# EAGLE board board (EAGLE 9.2.2)
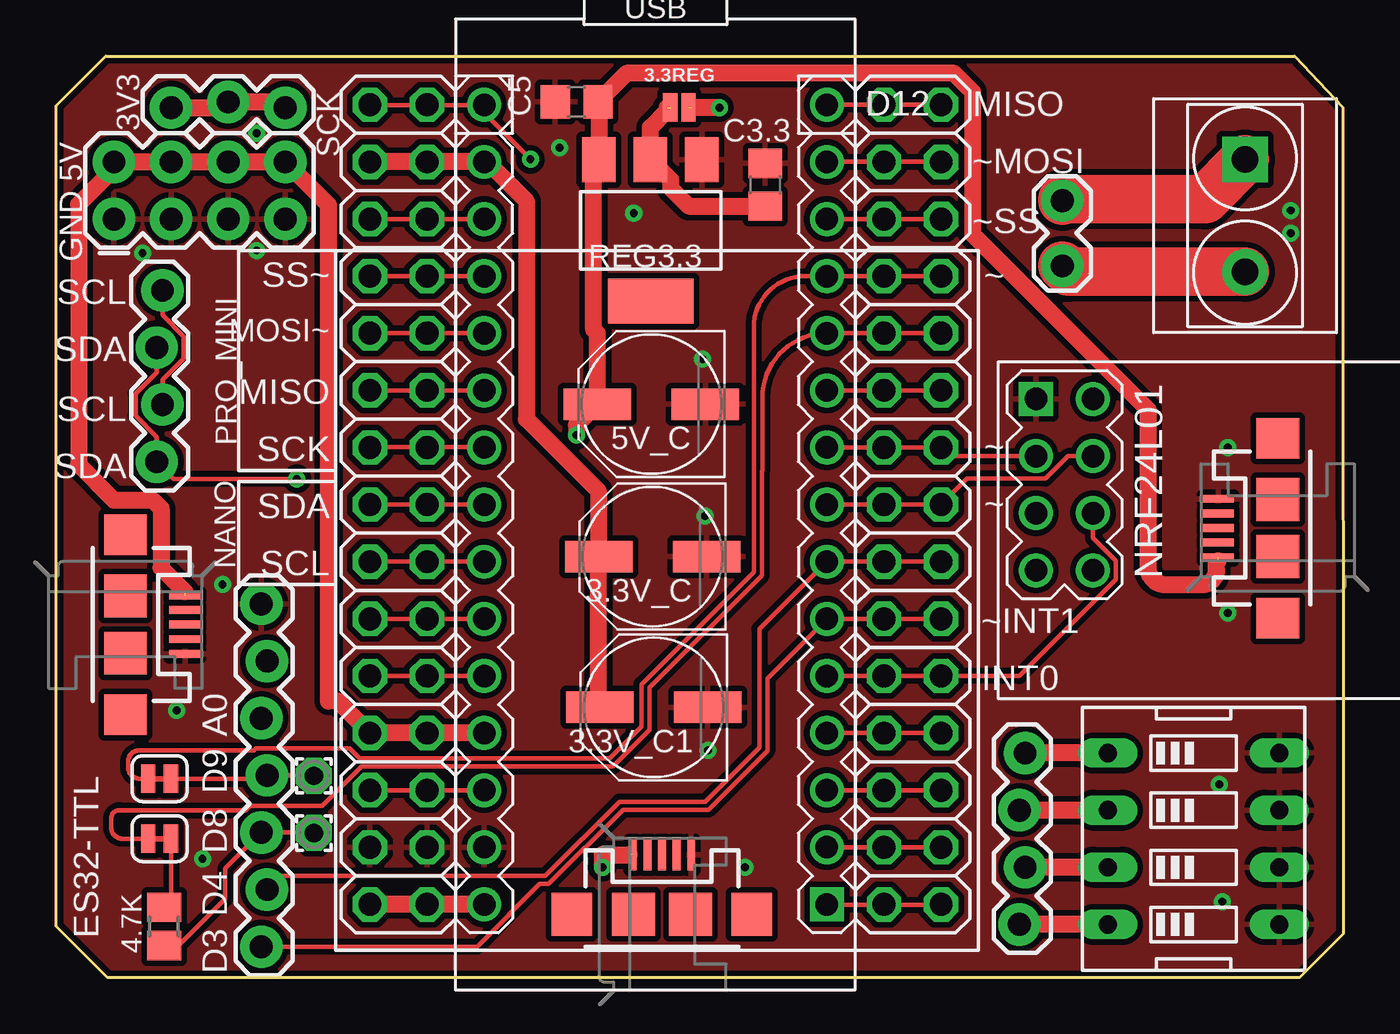
[diagram p0: board, top side]
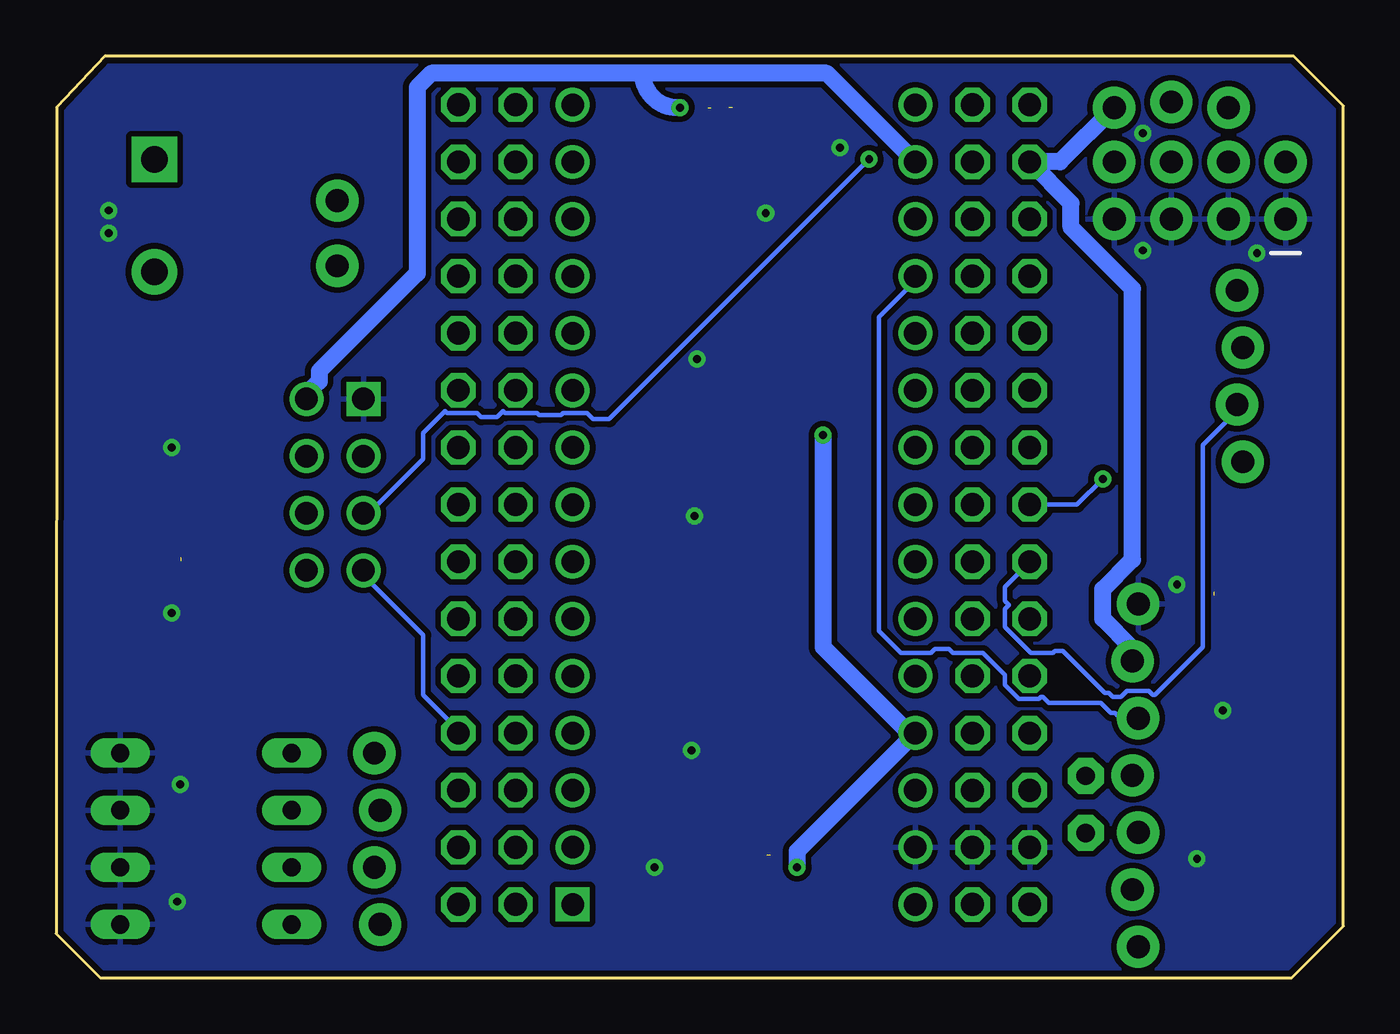
[diagram p1: board, bottom side, seen from below]

Size 57.23 x 40.97 mm. Coordinates in mm from the lower left corner, seen from the top.
Outline: 55.27,0 2.29,0 0,2.29 0,38.76 2.21,40.97 55.07,40.97 57.2,38.71 57.23,1.96 55.27,0
Copper layers (1*16): Top 0.035mm / dielectric 1.5mm / Bottom 0.035mm
Design rules "default *": minimum track width 6mil, minimum drill 0.35mm, track to track 6mil, track to pad 6mil, pad to pad 6mil, via to via 6mil, smd to smd 6mil, copper to edge 10mil, drill to drill 6mil, minimum pad ring 10mil, minimum via ring 8mil, stop-mask expansion 4mil, vias tented up to drill 0mil, thermal gap 10mil
Net classes: 0 default: width 0.203 mm; 1 power: width 0.762 mm, clearance 0.254 mm; 2 terminal: width 2.159 mm, clearance 0.305 mm

## Footprints (pad centres in the part's own frame; a part is rotated, then mirrored left to right if it is on the bottom)
SMT-JUMPER_2_NO_NO-SILK = smd 0.635 x 1.27: 1 -0.406,0; 2 0.406,0
PANASONIC_D = smd 3 x 1.4: + 2.4,0; - -2.4,0
1X03_LOCK = drill 1.016 pad 1.88: 1 0,0.127; 2 2.54,-0.127; 3 5.08,0.127
2X4 = drill 1.016 pad 1.88: 1 -3.81,-1.27; 2 -3.81,1.27; 3 -1.27,-1.27; 4 -1.27,1.27; 5 1.27,-1.27; 6 1.27,1.27; 7 3.81,-1.27; 8 3.81,1.27
C0805 = smd 1.3 x 1.5: 1 -0.95,0; 2 0.95,0
1X07_LOCK = drill 1.016 pad 1.88: 1 0,0.127; 2 2.54,-0.127; 3 5.08,0.127; 4 7.62,-0.127; 5 10.16,0.127; 6 12.7,-0.127; 7 15.24,0.127
1X04_LOCK = drill 1.016 pad 1.88: 1 0,0.127; 2 2.54,-0.127; 3 5.08,0.127; 4 7.62,-0.127
SMT-JUMPER_2_NC_TRACE_SILK = smd 0.635 x 1.27: 1 -0.508,0; 2 0.508,0
USB-MICROB = smd 1.4 x 0.35: D+ -2.65,0; D- -2.65,-0.65; GND -2.65,1.3; ID -2.65,0.65; VBUS -2.65,-1.3 | smd 1.9 x 1.8: MT1 0,-4; MT2 0,4 | smd 1.9 x 1.9: P$1 0,-1.27; P$2 0,1.27
ARDUINO-NANO-3.0 = drill 1 square: J1.1 17.78,7.62 | drill 1: J1.2 15.24,7.62; J1.3 12.7,7.62; J1.4 10.16,7.62; J1.5 7.62,7.62; J1.6 5.08,7.62; J1.7 2.54,7.62; J1.8 0,7.62; J1.9 -2.54,7.62; J1.10 -5.08,7.62; J1.11 -7.62,7.62; J1.12 -10.16,7.62; J1.13 -12.7,7.62; J1.14 -15.24,7.62; J1.15 -17.78,7.62; J2.1 17.78,-7.62; J2.2 15.24,-7.62; J2.3 12.7,-7.62; J2.4 10.16,-7.62; J2.5 7.62,-7.62; J2.6 5.08,-7.62; J2.7 2.54,-7.62; J2.8 0,-7.62; J2.9 -2.54,-7.62; J2.10 -5.08,-7.62; J2.11 -7.62,-7.62; J2.12 -10.16,-7.62; J2.13 -12.7,-7.62; J2.14 -15.24,-7.62; J2.15 -17.78,-7.62
WIRELESS-NRF24L01 = drill 1 square: 1 -12.7,6.35 | drill 1: 2 -10.16,6.35; 3 -12.7,3.81; 4 -10.16,3.81; 5 -12.7,1.27; 6 -10.16,1.27; 7 -12.7,-1.27; 8 -10.16,-1.27
1,6/0,8 = drill 0.813 pad 1.6 octagon: 1 0,0
2X15 = drill 1.016 octagon: 1 -17.78,-1.27; 2 -17.78,1.27; 3 -15.24,-1.27; 4 -15.24,1.27; 5 -12.7,-1.27; 6 -12.7,1.27; 7 -10.16,-1.27; 8 -10.16,1.27; 9 -7.62,-1.27; 10 -7.62,1.27; 11 -5.08,-1.27; 12 -5.08,1.27; 13 -2.54,-1.27; 14 -2.54,1.27; 15 0,-1.27; 16 0,1.27; 17 2.54,-1.27; 18 2.54,1.27; 19 5.08,-1.27; 20 5.08,1.27; 21 7.62,-1.27; 22 7.62,1.27; 23 10.16,-1.27; 24 10.16,1.27; 25 12.7,-1.27; 26 12.7,1.27; 27 15.24,-1.27; 28 15.24,1.27; 29 17.78,-1.27; 30 17.78,1.27
1X02_LOCK = drill 1.016 pad 1.88: 1 -0.178,0; 2 2.718,0
R2012 = smd 1.3 x 1.5: 1 -0.85,0; 2 0.85,0
SOT223 = smd 1.499 x 2.007: 1 -2.261,-3.15; 2 0.025,-3.15; 3 2.311,-3.15 | smd 3.81 x 2.007: 4 0,3.15
EDG-04 = drill 0.813 long: 1 -3.81,-3.81; 2 -1.27,-3.81; 3 1.27,-3.81; 4 3.81,-3.81; 5 3.81,3.81; 6 1.27,3.81; 7 -1.27,3.81; 8 -3.81,3.81
H2-5.0-10.5X8.0MM = drill 1.168 pad 2.032 square: 1 0,2.5 | drill 1.168 pad 2.032: 2 0,-2.5

## Placement (x,y rotation side)
3.3REG  JUMPER-SMT_2_NO_NO-SILK  [SMT-JUMPER_2_NO_NO-SILK]  27.71,38.68 0 top
3.3V_C  [PANASONIC_D]  26.52,18.72 180 top
3.3V_C1  [PANASONIC_D]  26.57,12.01 180 top
3V3  [1X03_LOCK]  10.19,38.81 180 top
5.GND  [2X4]  6.38,35 0 top
5V_C  [PANASONIC_D]  26.47,25.5 180 top
C3.3  100nF  [C0805]  31.52,35.26 270 top
C5  100nF  [C0805]  23.14,38.94 180 top
ES32-TTL  [1X07_LOCK]  9.25,1.37 90 top
I2C_1  [1X04_LOCK]  4.6,30.56 270 top
J4  [1X04_LOCK]  42.95,2.36 90 top
JP1  [SMT-JUMPER_2_NC_TRACE_SILK]  4.6,6.17 0 top
JP2  [SMT-JUMPER_2_NC_TRACE_SILK]  4.6,8.84 0 top
MICRO_1  [USB-MICROB]  54.31,19.99 0 top
MICRO_2  [USB-MICROB]  26.93,2.81 270 top
MICRO_3  [USB-MICROB]  3.07,15.7 180 top
NANO  ARDUINO-NANO-3.0  [ARDUINO-NANO-3.0]  26.64,21.03 270 top
NRF24L01  [WIRELESS-NRF24L01]  56.26,19.38 0 top
PAD1  [1,6/0,8]  11.46,8.97 180 top
PAD2  [1,6/0,8]  11.46,6.43 180 top
PH1  [2X15]  15.21,21.03 270 top
PH2  [2X15]  38.07,21.03 270 top
PIN1  [1X02_LOCK]  44.73,31.83 90 top
R1  4.7k  [R2012]  4.8,2.27 270 top
REG3.3  REG1117  [SOT223]  26.44,33.22 180 top
SW1  [EDG-04]  50.57,6.17 270 top
T1_5MM  5mm  [H2-5.0-10.5X8.0MM]  52.86,33.88 0 top

## Library data of the parts
3.3REG JP1 JP2 = SparkFun-Jumpers
3.3V_C 3.3V_C1 5V_C = rcl
3V3 5.GND ES32-TTL PIN1 = SparkFun-Connectors
C3.3 C5 = rcl; SPICEPREFIX: C
I2C_1 J4 = SparkFun-Connectors; PROD_ID: CONN-09696
MICRO_1-MICRO_3 = SparkFun-Connectors; PROD_ID: CONN-09505; SF_ID: PRT-08533
NANO NRF24L01 = diy-modules
PAD1 PAD2 = wirepad
PH1 PH2 = pinhead
R1 = rcl; SPICEPREFIX: R
REG3.3 = burr-brown; MPN: REG1117; OC_FARNELL: 1097566; OC_NEWARK: 14P6981
SW1 = special
T1_5MM = Seeed-Connector

## Nets
3.3V [power]: 3.3REG.2 3.3V_C1.+ 3.3V_C.+ 3V3.1 3V3.2 3V3.3 ES32-TTL.6 NANO.J2.14 NRF24L01.2 PH1.3 PH1.4
5V [power]: 5.GND.2 5.GND.4 5.GND.6 5.GND.8 5V_C.+ C5.1 MICRO_1.VBUS MICRO_2.VBUS MICRO_3.VBUS NANO.J2.4 PH1.23 PH1.24 REG3.3.3
A6: NANO.J2.6 PH1.19 PH1.20
A7: NANO.J2.5 PH1.21 PH1.22
CE_NRF: NANO.J1.9 NRF24L01.3 PH2.13 PH2.14
CSN_NRF: NANO.J1.8 NRF24L01.4 PH2.15 PH2.16
ES32_AUX: ES32-TTL.5 NANO.J2.12 PH1.7 PH1.8
ES32_RXD: ES32-TTL.3 PAD2.1 R1.2
ES32_TXD: JP2.1 NANO.J1.12 PH2.7 PH2.8
GND [power]: 3.3V_C1.- 3.3V_C.- 5.GND.1 5.GND.3 5.GND.5 5.GND.7 5V_C.- C3.3.1 C5.2 ES32-TTL.7 MICRO_1.GND MICRO_2.GND MICRO_3.GND NANO.J2.2 NRF24L01.1 PH1.27 PH1.28 REG3.3.1 SW1.5 SW1.6 SW1.7 SW1.8
M0: ES32-TTL.1 NANO.J1.6 PH2.19 PH2.20
M1: ES32-TTL.2 NANO.J1.7 PH2.17 PH2.18
MISO_NRF: NANO.J1.4 NRF24L01.7 PH2.23 PH2.24
MOSI_NRF: NANO.J1.5 NRF24L01.6 PH2.21 PH2.22
N$1: NANO.J1.14 PH2.3 PH2.4
N$2 [power]: 3.3REG.1 C3.3.2 REG3.3.2
N$3: NANO.J2.13 PH1.5 PH1.6
N$4: NANO.J1.13 PH2.5 PH2.6
N$5: NANO.J2.11 PH1.9 PH1.10
N$6: NANO.J2.10 PH1.11 PH1.12
N$7: NANO.J2.9 PH1.13 PH1.14
N$8: JP1.2 R1.1
N$9: ES32-TTL.4 JP2.2 PAD1.1
N$16: NANO.J1.15 PH2.1 PH2.2
N$17: JP1.1 NANO.J1.11 PH2.9 PH2.10
N$21: NANO.J1.10 PH2.11 PH2.12
N$23 [terminal]: PIN1.2 T1_5MM.1
N$26 [terminal]: PIN1.1 T1_5MM.2
N$28: NANO.J1.3 PH2.25 PH2.26
N$29: NANO.J1.2 PH2.27 PH2.28
N$30: NANO.J1.1 PH2.29 PH2.30
N$39 [power]: J4.1 SW1.4
N$40 [power]: J4.2 SW1.3
N$41 [power]: J4.3 SW1.2
N$42 [power]: J4.4 SW1.1
RST: NANO.J2.3 PH1.25 PH1.26
SCK_NRF: NANO.J2.15 NRF24L01.5 PH1.1 PH1.2
SCL: I2C_1.1 I2C_1.3 NANO.J2.7 PH1.17 PH1.18
SDA: I2C_1.2 I2C_1.4 NANO.J2.8 PH1.15 PH1.16
VIN [power]: NANO.J2.1 PH1.29 PH1.30

## Tracks (layer width: path | path; a pad name or v marks a point on that pad's centre or on a via)
3.3V  (via drill 0.35)  (1 unrouted)
  Top 0.762: 3.3V_C1.+ 24.1,12.03 24.1,18.69 3.3V_C.+ 24.1,19.05 24.1,21.63 20.9,24.83 20.9,34.52 19.22,36.21 19.04,36.21 NANO.J2.14 PH1.4 PH1.3 | 3V3.3 7.39,38.68 3V3.2 9.93,38.94 3V3.1 | v29.49,38.68 28.26,38.68
  Bottom 0.762: NRF24L01.2 46.06,25.81 46.06,25.98 45.53,26.52 45.53,26.96 41.17,31.32 41.17,39.59 40.55,40.21 31.14,40.21 | ES32-TTL.6 9.37,14.64 10.69,15.96 10.69,17.26 9.37,18.59 9.37,30.63 12.1,33.36 12.1,34.43 PH1.3 12.6,36.27 3V3.1 | NANO.J2.14 22.96,40.21 31.14,40.21 | v29.49,38.68 29.62,38.68 arc90 31.14,40.21
5V  (via drill 0.35)  (3 unrouted)
  Top 0.762: NANO.J2.4 PH1.24 PH1.23 12.52,12.29 12.1,12.29 12.1,34.35 5.GND.8 5.GND.6 5.GND.4 5.GND.2 2.57,35.96 0.99,34.38 0.99,22.81 2.57,21.23 4.29,21.23 4.66,20.86 4.66,18.22 5.72,17.16 | v24.28,4.9 24.28,5.46 25.47,5.46 | v23.13,24.12 23.13,24.56 5V_C.+ 24.07,28.64 23.9,28.81 23.9,36.14 REG3.3.3 24.13,38.9 C5.1 25.36,40.21 39.92,40.21 40.74,39.39 40.74,33.05 48.54,25.26 48.54,18.24 arc90 49.3,17.48 50.95,17.48 arc90 51.59,18.11 51.59,18.46 51.66,18.53
  Bottom 0.762: v23.13,24.12 23.13,14.69 19.3,10.87 NANO.J2.4 24.28,5.61 v24.28,4.9
A6
  Top 0.203: PH1.19 PH1.20 NANO.J2.6
A7
  Top 0.203: NANO.J2.5 PH1.22 PH1.21
CE_NRF
  Top 0.203: NANO.J1.9 PH2.13 PH2.14 39.73,23.19 NRF24L01.3
CSN_NRF
  Top 0.203: NRF24L01.4 44.99,23.19 43.98,22.18 40.5,22.18 PH2.16 PH2.15 NANO.J1.8
ES32_AUX
  Top 0.203: NANO.J2.12 PH1.8 PH1.7
  Bottom 0.203: ES32-TTL.5 9.17,11.58 9.97,11.58 10.15,11.76 10.33,11.76 10.77,12.2 13.08,12.2 13.35,12.47 13.44,12.47 13.53,12.38 14.41,12.38 15.04,13.01 15.04,13.45 16.01,14.43 17.35,14.43 17.53,14.61 18.15,14.61 18.33,14.43 19.66,14.43 20.64,15.41 20.64,29.36 19.04,30.96 19.04,31.14 NANO.J2.12
ES32_RXD
  Top 0.203: PAD2.1 11.43,6.45 ES32-TTL.3 7.52,4.85 7.52,3.51 5.44,1.42 R1.2
ES32_TXD
  Top 0.203: PH2.8 PH2.7 NANO.J1.12 33.3,31.19 arc90 31.01,28.91 31.01,18.03 26.02,13.04 26.02,11.17 24.61,9.75 13.48,9.75 13.05,10.19 8.88,10.19 8.8,10.11 3.71,10.11 arc90 3.2,9.6 3.2,9.35 arc90 3.71,8.84 JP2.1
GND  (via drill 0.35)
  other vias: 8.92,37.54 54.89,33.1 54.89,34.11 22.38,36.91 52.1,23.57 52.1,16.21 5.36,11.89 6.5,5.28 51.84,3.38 51.71,8.59 28.98,10.11 30.63,4.9 28.73,27.51 28.85,20.52 25.68,33.99 3.84,32.21 8.92,32.33 7.39,17.48
  pour Top: -29.69,61.39 -29.69,-27.1 80.04,-27.1 80.04,61.39
  pour Bottom: -29.95,-27.36 80.8,-27.36 80.8,61.54 -29.95,61.54
M0
  Top 0.203: 36.73,15.94 PH2.19 | PH2.20 39.31,15.94 36.91,15.94 PH2.19 | PH2.19 NANO.J1.6 31.62,13.31 31.62,10.09 29,7.47 25.19,7.47 21.89,4.17 21.49,4.17 20.13,2.81 20.13,2.79 18.71,1.37 ES32-TTL.1
M1
  Top 0.203: PH2.18 PH2.17 NANO.J1.7 31.27,15.49 31.27,10.24 28.85,7.82 25.04,7.82 21.74,4.52 9.98,4.52 ES32-TTL.2
MISO_NRF
  Top 0.203: PH2.24 PH2.23 NANO.J1.4
  Bottom 0.203: NRF24L01.7 43.48,18.07 43.48,17.81 40.91,15.23 40.91,12.56 39.4,11.05 39.4,10.87 PH2.24
MOSI_NRF
  Top 0.203: NRF24L01.6 46.1,19.54 47.11,18.53 47.11,17.69 42.83,13.41 PH2.22 PH2.21 NANO.J1.5
N$1
  Top 0.203: NANO.J1.14 PH2.3 PH2.4
N$2  (1 unrouted)
  Top 0.762: C3.3.2 28.12,34.31 27.32,35.11 27.32,35.47 REG3.3.2 26.42,37.8 27.17,38.54 27.17,38.68
N$3
  Top 0.203: NANO.J2.13 PH1.6 PH1.5
N$4
  Top 0.203: PH2.6 PH2.5 NANO.J1.13
N$5
  Top 0.203: PH1.9 PH1.10 NANO.J2.11
N$6
  Top 0.203: NANO.J2.10 PH1.12 PH1.11
N$7
  Top 0.203: NANO.J2.9 18.95,23.58 16.55,23.58 PH1.14 16.46,23.58 13.97,23.58 PH1.13
N$8
  Top 0.203: JP1.2 5.11,3.12 R1.1
N$9
  Top 0.203: PAD1.1 11.46,8.99 ES32-TTL.4 9.22,8.84 JP2.2
N$16
  Top 0.203: PH2.2 PH2.1 NANO.J1.15
N$17
  Top 0.203: PH2.10 PH2.9 NANO.J1.11 arc90 31.39,25.78 31.39,22.56 31.37,22.53 31.37,17.89 26.38,12.9 26.38,11.02 24.76,9.4 13.57,9.4 11.82,7.65 8.62,7.65 8.42,7.44 2.82,7.44 arc90 2.44,7.06 2.44,6.68 arc90 2.95,6.17 JP1.1
N$21
  Top 0.203: PH2.12 PH2.11 NANO.J1.10
N$23
  Top 2.159: PIN1.2 44.73,34.61 51.08,34.61 T1_5MM.1
N$26
  Top 2.159: T1_5MM.2 44.99,31.38 PIN1.1
N$28
  Top 0.203: PH2.26 PH2.25 NANO.J1.3
N$29
  Top 0.203: NANO.J1.2 PH2.27 PH2.28
N$30
  Top 0.203: NANO.J1.1 34.33,3.23 36.73,3.23 PH2.29 36.82,3.23 39.31,3.23 PH2.30
N$39
  Top 0.762: SW1.4 J4.1
N$40
  Top 0.762: SW1.3 J4.2
N$41
  Top 0.762: SW1.2 J4.3
N$42
  Top 0.762: SW1.1 J4.4
RST
  Top 0.203: NANO.J2.3 PH1.26 PH1.25
SCK_NRF  (via drill 0.35)
  Top 0.203: PH1.1 13.97,38.79 16.46,38.79 PH1.2 16.55,38.79 18.95,38.79 NANO.J2.15 19.04,38.79 19.04,38.43 v21.08,36.39
  Bottom 0.203: NRF24L01.5 43.31,20.65 40.91,23.05 40.91,24.21 39.93,25.18 39.84,25.1 38.51,25.1 38.33,24.92 37.62,24.92 37.35,25.18 37.26,25.1 35.84,25.1 35.75,25.01 34.77,25.01 34.68,25.1 33.62,25.1 33.35,24.83 32.64,24.83 v21.08,36.39
SCL
  Top 0.203: NANO.J2.7 PH1.18 PH1.17 | I2C_1.3 4.72,26.58 5.66,27.52 5.66,28.51 4.72,29.45 I2C_1.1
  Bottom 0.203: I2C_1.3 4.72,25.18 6.24,23.67 6.24,14.69 8.37,12.56 8.46,12.56 8.64,12.74 9.61,12.74 9.88,12.47 10.24,12.47 10.41,12.65 10.59,12.65 12.46,14.52 12.81,14.52 12.9,14.43 13.88,14.43 15.04,15.58 15.04,16.38 14.86,16.56 15.04,16.74 15.04,17.36 13.97,18.43 PH1.17
SDA  (via drill 0.35)
  Top 0.203: PH1.15 PH1.16 NANO.J2.8 | I2C_1.2 4.47,26.91 3.53,25.97 3.53,24.98 4.47,24.04 I2C_1.4 5.23,22.17 v10.69,22.17
  Bottom 0.203: PH1.15 11.84,21.03 v10.69,22.17
VIN
  Top 0.762: NANO.J2.1 PH1.30 PH1.29

## Text on the board
tPlace: SCK | D12 | MISO | 5V | ~MOSI | GND | ~SS | SS~ | SCL | PRO_MINI | ~ | MOSI~ | SDA | MISO | SCL | SDA | SCK | NANO | ~ | SDA | ~ | SCL | ~INT1 | INT0 | A0 | D9 | D8 | 4.7K | D4 | D3
silktop: TOP
silkbottom: BOT